# Altium PCB IO BOARD CERES V5.PcbDoc
Units mm, origin at the board's own origin, x right, y up, seen from the top; angles counter-clockwise.
Board outline 82 x 99.2 mm, 2 copper layers (Component Side, Bottom Layer), stack 1.571 mm thick; 65 components, 40 nets, 238 pads, 32 vias.
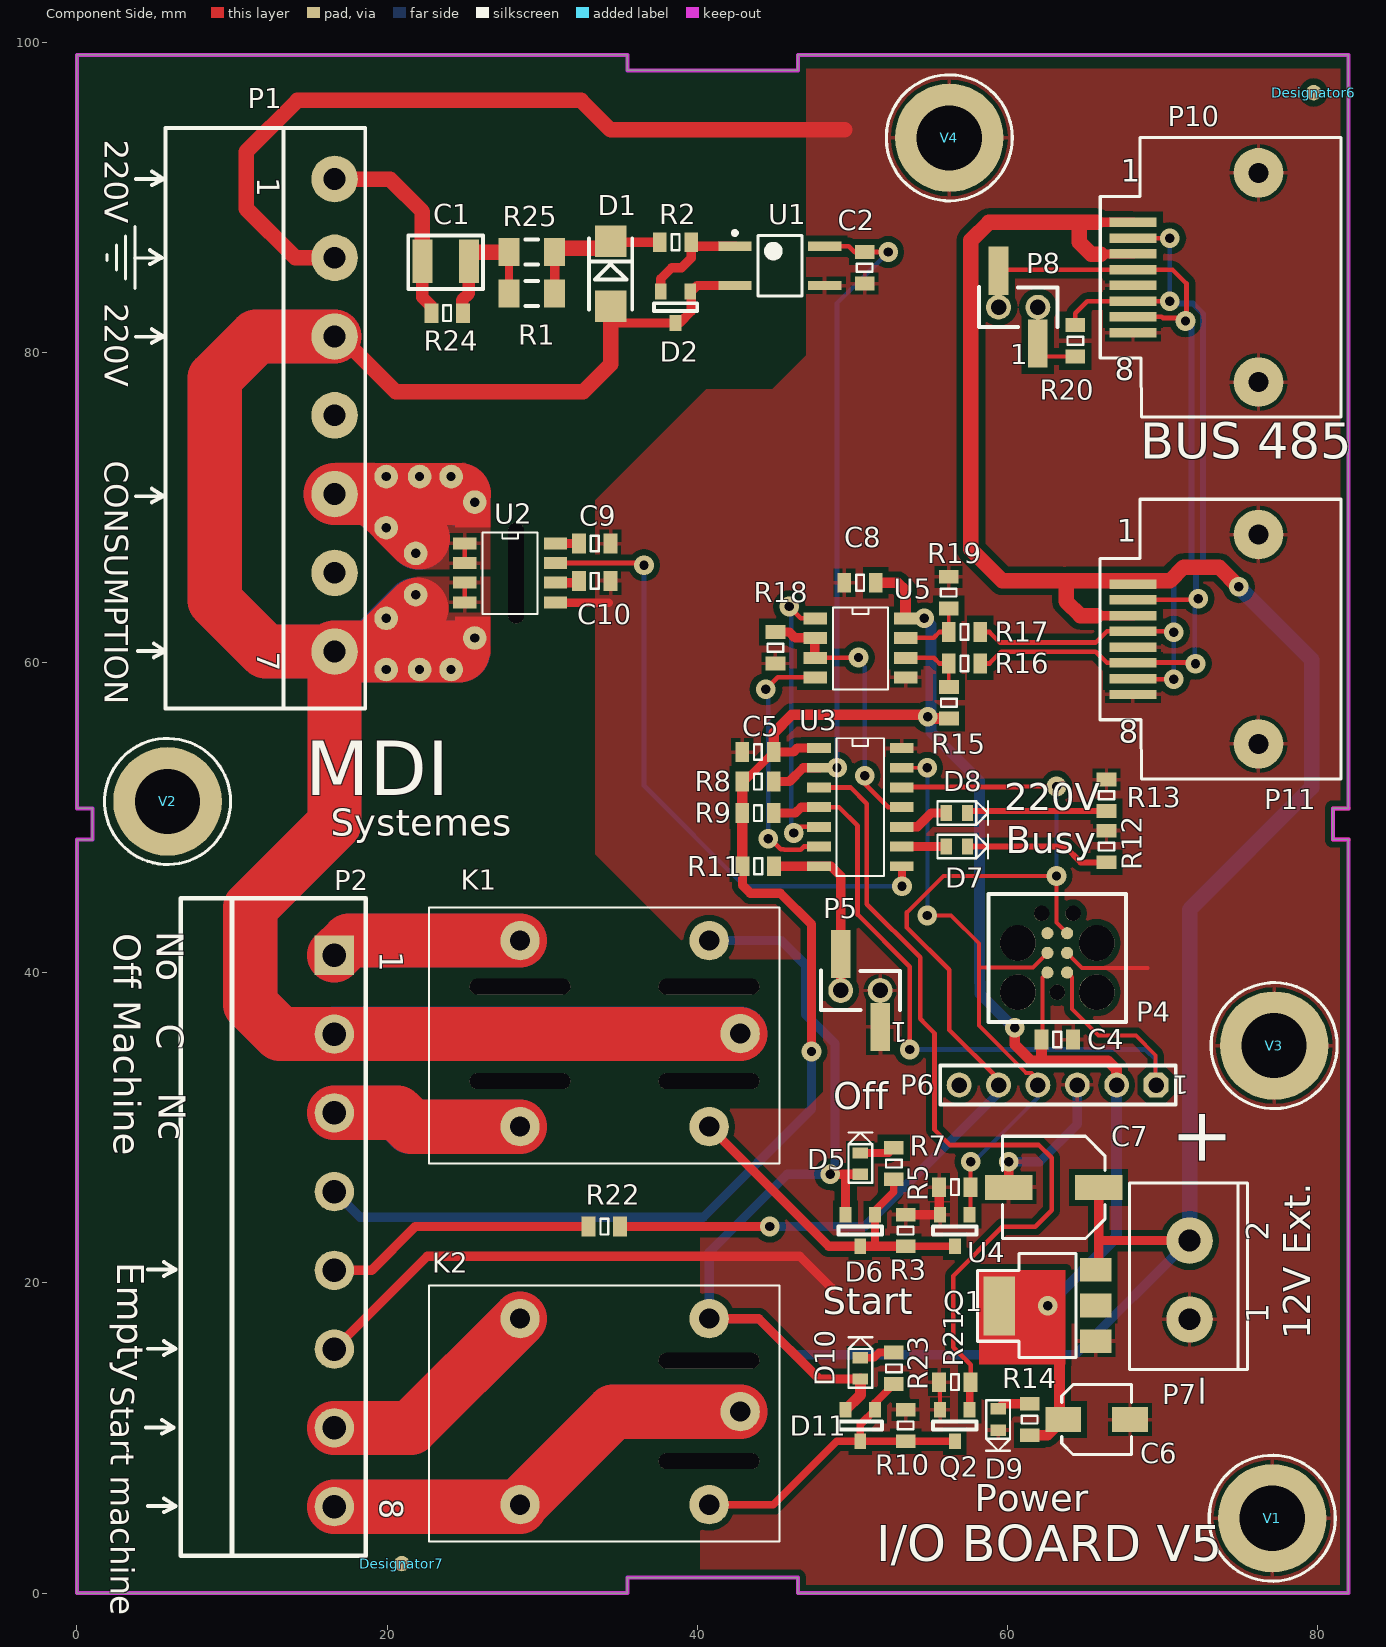
[diagram p0: Component Side view]
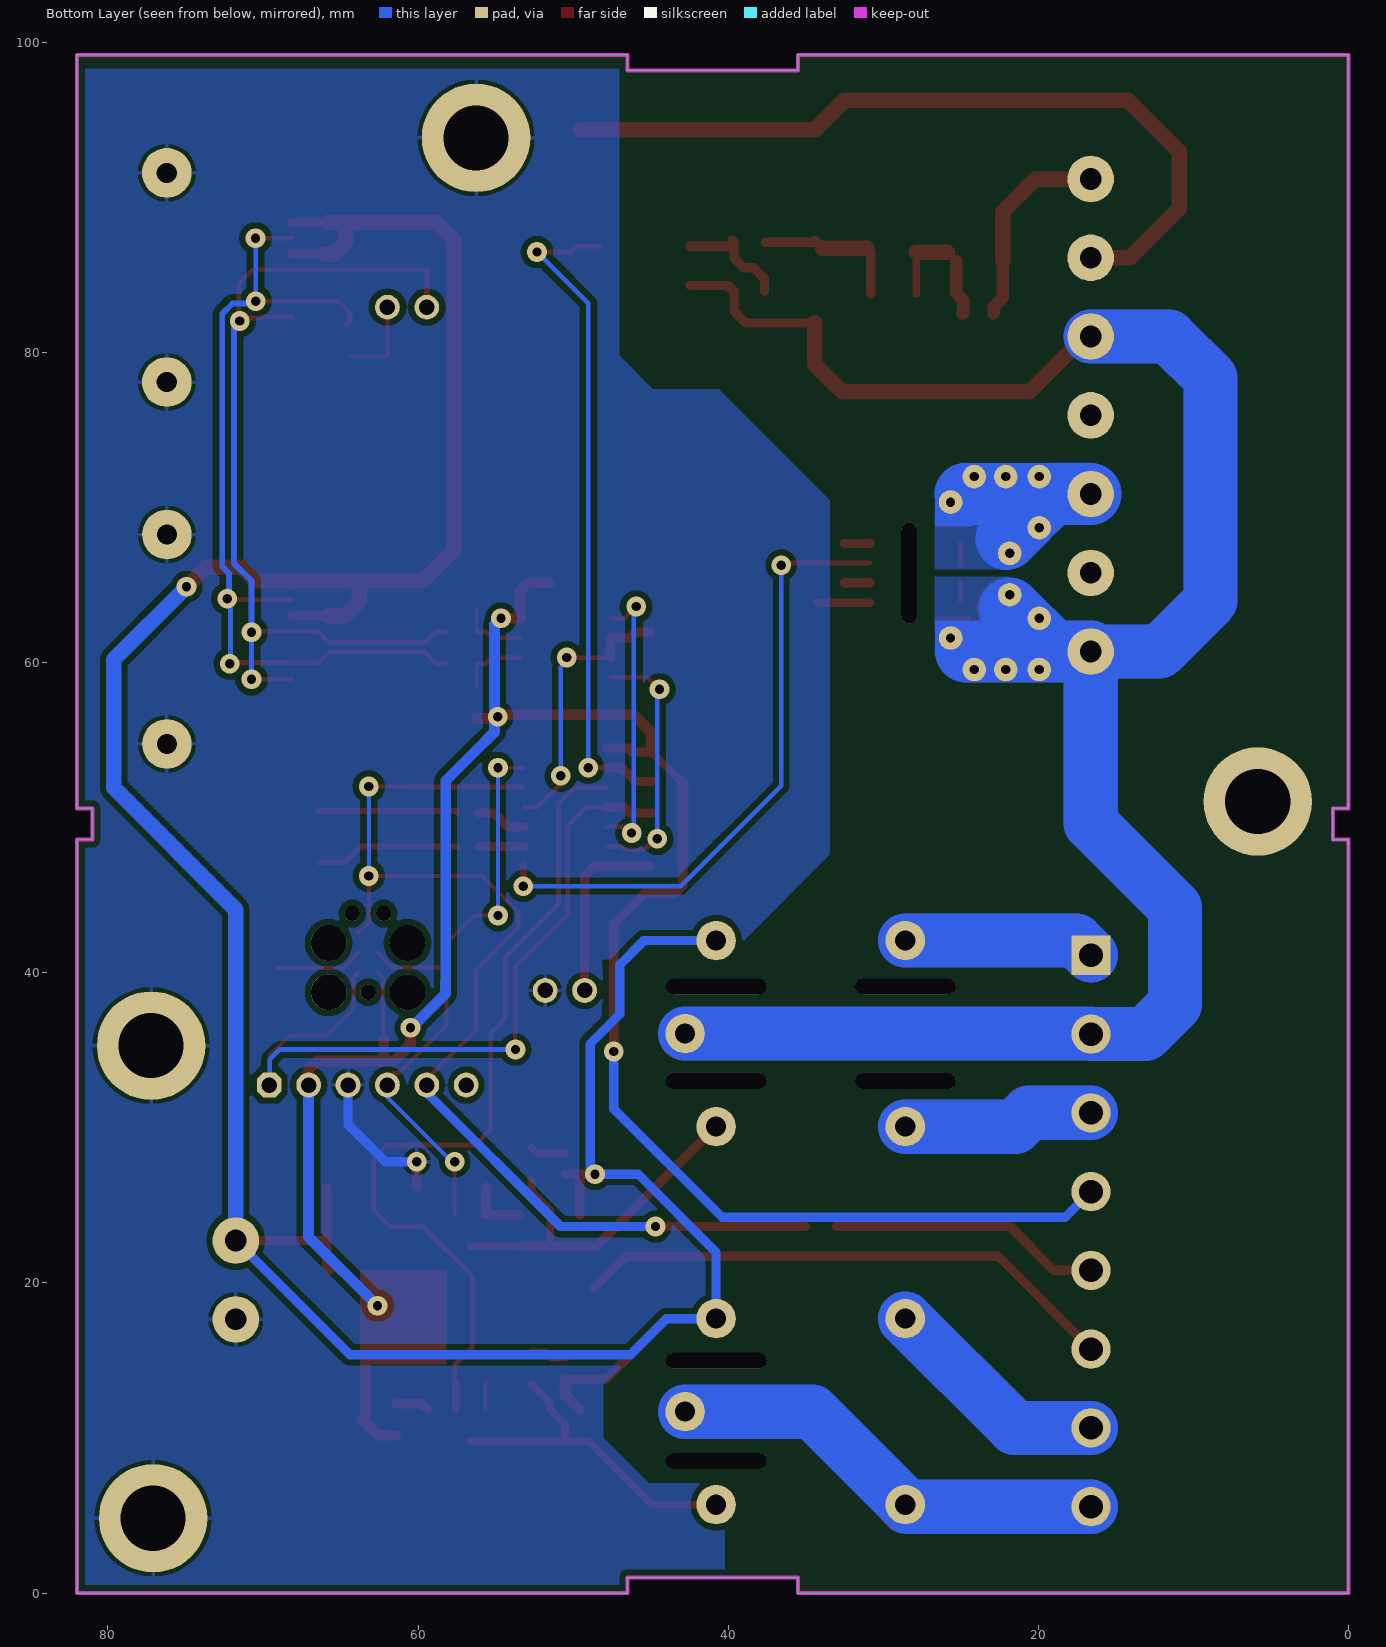
[diagram p1: Bottom Layer view, seen from below]
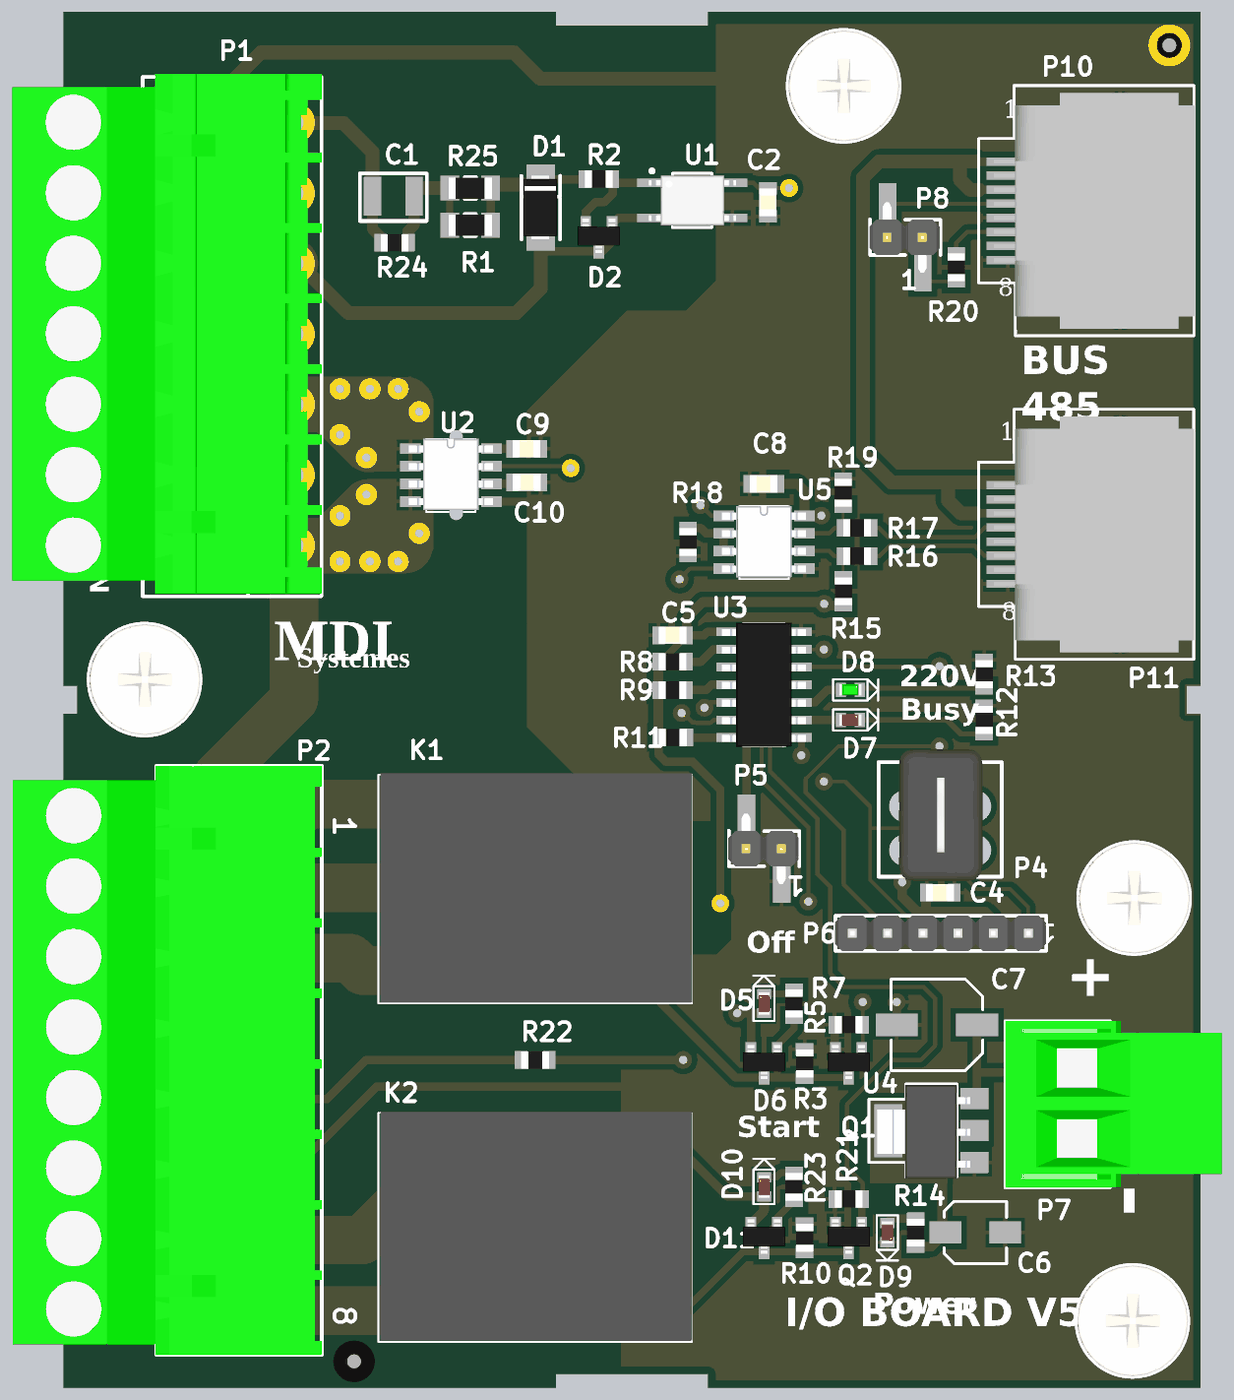
[diagram p2: 3D render of the assembled board from above, using the file's embedded part models]

## Layer stack, top to bottom
Top Solder: solder mask 0.0102, Solder Resist, Dk 3.5
Component Side: signal copper 0.0356
Dielectric 1: core 1.5, FR-4, Dk 4.2
Bottom Layer: signal copper 0.0356
Solder Side: solder mask 0.0102, Solder Resist, Dk 3.5

## Board outline
0,0 0,48.6 1,48.6 1,50.6 0,50.6 0,99.2 35.5,99.2 35.5,98.2 46.5,98.2 46.5,99.2 82,99.2 82,50.6 81,50.6 81,48.6 81.996,48.603 81.996,0 46.5,0 46.5,1 35.5,1 35.5,0

## Design rules (kind name [scope] priority, off if disabled: settings)
Clearance Clearance_2 [InPolygon vs InNet('TERRE')] p1: gap=2
Clearance Clearance_1 [InPolygon] p2: gap=0.4
Clearance [All] p3: gap=0.3
DiffPairsRouting DiffPairsRouting_1 [All] p1: maxlimit=0.4 minlimit=0.254 mostfreqgap=0.3 toplayer_minwidth=0.381 toplayer_maxwidth=0.381 toplayer_prefwidth=0.3 bottomlayer_minwidth=0.381 bottomlayer_maxwidth=0.381 bottomlayer_prefwidth=0.3 maxuncoupledlength=5
FabricationTestPointUsage TestPointUsage [All] p1: valid=0 allowmultiple=FALSE
FabricationTestpoint Testpoint [All] p1: side=3 testpointundercomponent=TRUE minsize=1.016 maxsize=2.54 preferedsize=1.524 minholesize=0 maxholesize=1.016 preferedholesize=0.813 testpointgrid=0.025 allowsidetop=TRUE allowsidebottom=TRUE usegrid=TRUE gridtolerance=0
HoleSize [All] p1: absolutevalues=TRUE maxlimit=10 minlimit=0.025 maxpercent=80.000 minpercent=20.000
MinimumSolderMaskSliver [All] p1: minsoldermaskwidth=0
PolygonConnect [All] p1: connectstyle=Relief reliefconductorwidth=0.254 reliefentries=4 polygonreliefangle="90 Angle" airgapwidth=0.254
RoutingVias [All] p1: holewidth=0.6 width=1.27 viastyle="Through Hole" minholewidth=0.5 minwidth=1.27 maxholewidth=0.9 maxwidth=1.35
SMDNeckDown [All] p1: percent=200.000
SilkToSilkClearance [All] p1: silktosilkclearance=0.1
SilkToSolderMaskClearance SilkscreenOverComponentPads [IsPad] p1: minsilkscreentomaskgap=0.1 clearancetoexposedcopper=TRUE
SolderMaskExpansion [All] p1: expansion=0
Width "Schematic Width Constraint" [InNet('GND')] p1: maxlimit=2 minlimit=0.254 preferedwidth=0.55
Width Width_3 [InNet('+5')] p2: maxlimit=2 minlimit=0.254 preferedwidth=0.7
Width Width_2 [InNet('3.3')] p3: maxlimit=2 minlimit=0.254 preferedwidth=0.7
Width Width_1 [InNet('+12')] p4: maxlimit=2 minlimit=0.254 preferedwidth=0.7
Width [All] p5: maxlimit=6 minlimit=0.254 preferedwidth=0.6
23 further rules are at their usual default settings.

## Classes and differential pairs
differential pair D: +D_P -D_N
differential pair D1: +D1_P -D1_N

## Components (designator, comment, footprint, x,y, rotation, side; value= is the part's Value field where it differs from the comment)
C1 "150nF" C1210 23.78,85.89 r0 top
C2 "10uF" C0805 50.8,85.471 r270 top
C4 "100nF" C0805 63.225,35.7 r180 top
C5 "100nF" C0805 43.921,54.242 r0 top
C6 "10uF" KEMET_4 65.765,11.189 r0 top
C7 "100uF" KEMET_63 62.992,26.162 r180 top
C8 "100nF" C0805 50.509,65.159 r180 top
C9 "100nF" C0805 33.401,67.691 r180 top
C10 "1nF" C0805 33.401,65.278 r0 top
D1 "BZG03C12" SMA 34.417,85.09 r90 top
D2 "BAT54S" SOT23 38.608,82.931 r0 top
D5 "HSMH-C190" 0603-LEDR 50.525,27.699 r90 top
D6 "BAT54S" SOT23 50.525,23.381 r0 top
D7 "HSMH-C190" 0603-LEDR 56.748,48.146 r0 top
D8 "HSMH-C190" 0603-LEDV 56.748,50.305 r0 top
D9 "HSMH-C190" 0603-LEDR 59.415,11.189 r270 top
D10 "HSMH-C190" 0603-LEDR 50.525,14.491 r90 top
D11 "BAT54S" SOT23 50.525,10.808 r0 top
Designator6 "Comment" MIRE 79.756,96.774 r90 top
Designator7 "Comment" MIRE 20.955,1.905 r90 top
K1 "RELAY NAISJS" RELAIG5L 42.778,36.081 r180 top
K2 "RELAY NAISJS" RELAIG5L 42.778,11.697 r180 top
P1 "Header 7" CO7P508-90 16.616,91.199 r270 top locked
P2 "Header 8" "CO8P508 - 90°" 16.6,41.13 r270 top locked
P4 "ICSP1" TC2030 63.225,38.748 r90 top
P5 "CLR" M20_1X2 50.53,38.862 r180 top
P6 "ICSP2" 6SIP100 69.596,32.766 r180 top
P7 "Alim 12V ext." CO2P508 71.755,17.653 r90 top
P8 "EIA-485 TERMINAISON" M20_1X2 60.706,82.931 r180 top
P10 "RJ45" RJ45_8-5406721-1 72.157,84.847 r180 top
P11 "RJ45" RJ45_8-5406721-1 72.154,61.514 r180 top
Q1 "2N7002" SOT23 56.621,23.381 r0 top
Q2 "2N7002" SOT23 56.621,10.808 r0 top
R1 "1.5K 1/2W" R1206 29.337,83.82 r180 top
R2 "1K" R0805 38.608,87.122 r0 top
R3 "56K" R0805 53.446,23.381 r270 top
R5 "56K" R0805 56.621,26.175 r0 top
R7 "1K" R0805 52.684,27.699 r90 top
R8 "56K" R0805 43.921,52.337 r180 top
R9 "56K" R0805 43.921,50.305 r180 top
R10 "56K" R0805 53.446,10.808 r270 top
R11 "56K" R0805 43.942,46.876 r180 top
R12 "220" R0805 66.4,48.146 r270 top
R13 "220" R0805 66.4,51.448 r270 top
R14 "270" R0805 61.447,11.189 r270 top
R15 "1M" R0805 56.24,57.417 r270 top
R16 "56" R0805 57.24,59.952 r0 top
R17 "56" R0805 57.24,61.984 r0 top
R18 "1K" R0805 45.048,60.968 r90 top
R19 "1M" R0805 56.224,64.524 r270 top
R20 "120" R0805 64.389,80.772 r90 top
R21 "56K" R0805 56.621,13.602 r0 top
R22 "1K" R0805 34.015,23.635 r180 top
R23 "1K" R0805 52.684,14.491 r90 top
R24 "1M" R0805 23.876,82.55 r180 top
R25 "3.3K 1/2W" R1206 29.337,86.487 r180 top
U1 "HCPL-181" OPTO-4PIN 45.339,85.598 r0 top
U2 "ACS712" SOIC8 27.94,65.799 r0 top
U3 "PIC16F1824" SO-14 50.525,50.686 r0 top
U4 "LM1117DT-5.0" SOT223 62.59,18.542 r90 top
U5 "ADM4851ARZ" SOIC8 50.53,60.955 r0 top
V1 "VIS" VIS42 77.089,4.826 r0 top
V2 "VIS" VIS42 5.842,51.054 r0 top
V3 "VIS" VIS42 77.216,35.306 r0 top
V4 "VIS" VIS42 56.261,93.853 r0 top

## Footprints (in the part's own frame and the unit in brackets; to place one, negate y for a bottom-side part, rotate by r counter-clockwise, add the part's x,y. Pads: shape width x height; smd on the part's side, far side on the other; paste and mask are expansions set on the pad)
6SIP100 [mm]
  oct 1.6x1.6 hole 1: 1(0,0)
  round 1.6 hole 1: 2(2.54,0) 3(5.08,0) 4(7.62,0) 5(10.16,0) 6(12.7,0)
  silkscreen extent -1.27,-1.27 13.92,1.27, body extent -1.27,-1.27 13.96,1.27, height 8.4
0603-LEDR [mm]
  rect 0.725x1.016 smd paste+0 mask+0: 1(-0.69,0) 2(0.69,0)
  silkscreen extent -1.24,-0.76 2.01,0.76, body extent -0.8,-0.4 0.8,0.4, height 0.69
0603-LEDV [mm]
  rect 0.725x1.016 smd: 1(-0.69,0) 2(0.69,0)
  silkscreen extent -1.24,-0.76 2.01,0.76, body extent -0.8,-0.4 0.8,0.4, height 0.69
C0805 [mil]
  rect 35x50 smd: 1(-40,0) 2(40,0)
  silkscreen extent -10,-20 10,20, body extent -39,-25 40,25, height 56
C1210 [mm]
  rect 1.27x2.8 smd paste+0 mask+0: 1(-1.5,0)
  rect 1.27x2.8 smd mask+0: 2(1.5,0)
  silkscreen extent -2.41,-1.78 2.41,1.65, body extent -1.52,-1.27 1.52,1.27, height 1
CO2P508 [mm]
  round 3 hole 1.4: 1(0,0) 2(5.08,0)
  silkscreen extent -3.23,-3.75 8.79,3.86, body extent -3.2,-11.79 8.78,3.86, height 22.32
CO7P508-90 [mm]
  round 3 hole 1.4: 1(0,0) 2(5.08,0) 3(10.16,0) 4(15.24,0) 5(20.32,0) 6(25.4,0) 7(30.48,0)
  silkscreen extent -3.3,-10.91 34.14,1.98, body extent -3.51,-20.3 33.93,2, height 15.56
"CO8P508 - 90°" [mil]
  rect 100x100 hole 60: 1(0,0)
  round 100 hole 60: 2(200,0) 3(400,0) 4(600,0) 5(800,0) 6(1000,0) 7(1200,0) 8(1400,0)
  silkscreen extent -145,-390 1525,80, body extent -146,-798 1526,80, height 606
KEMET_4 [mm] "Aluminum Electrolytic Capacitor, Body 4,30x4,30x6,10mm, IPC Medium Density"
  rect 2.3x1.6 smd: 1(-2.15,0) 2(2.15,0)
  silkscreen extent -2.25,-2.25 2.25,2.25, body extent -2.6,-2.25 2.6,2.25, height 4.7
KEMET_63 [mm] "Aluminum Electrolytic Capacitor, Body 6,50x6,50x6,10mm, IPC Medium Density"
  rect 3.05x1.6 smd: 1(-2.9,0) 2(2.9,0)
  silkscreen extent -3.3,-3.3 3.3,3.3, body extent -3.49,-3.39 3.51,3.41, height 8.8
M20_1X2 [mm] "Connecteur Harwin_M20-8770242"
  rect 1.27x3.1 smd: 1(-1.27,2.35) 2(1.27,-2.35)
  round 1.6 hole 1: 1(-1.27,0) 2(1.27,0)
  silkscreen extent -2.54,-1.3 2.54,1.27, body extent -2.5,-2.54 2.58,2.54, height 9.95
MIRE [mm]
  round 1 smd mask+1: Mire(0,0)
OPTO-4PIN [mm] "SOP, 4-Leads, Body 3,60x4,40mm, Pitch 2,54mm, IPC Medium Density"
  rect 2.15x0.6 smd: 1(-2.9,1.27) 2(-2.9,-1.27) 3(2.9,-1.27) 4(2.9,1.27)
  silkscreen extent -3.02,-1.95 1.43,2.24, body extent -3.13,-1.8 3.17,1.8, height 2.2
R0805 [mil]
  rect 35x50 smd: 1(-40,0) 2(40,0)
  silkscreen extent -10,-20 10,20, body extent -39,-24 39,25, height 20
R1206 [mm]
  rect 1.35x1.8 smd: 1(-1.475,0) 2(1.475,0)
  silkscreen extent -0.4,-0.8 0.4,0.8, body extent -1.55,-0.76 1.55,0.79, height 0.57
RELAIG5L [mm]
  round 2.54 hole 1.295: 1(0,0) 2(2,-6) 3(14.2,-6) 4(14.2,6) 5(2,6)
  silkscreen extent -2.54,-8.13 20.07,8.38, body extent -2.57,-8.2 19.93,8.3, height 19
RJ45_8-5406721-1 [mm] "TE Connectivity"
  rect 3.05x0.6 smd: 1(4.047,-3.556) 2(4.047,-2.54) 3(4.047,-1.524) 4(4.047,-0.508) 5(4.047,0.508) 6(4.047,1.524) 7(4.047,2.54) 8(4.047,3.556)
  round 3.2 hole 1.3: 9(-4.047,6.75) 9(-4.047,-6.75)
  silkscreen extent -9.36,-9.03 6.16,9, body extent -9.41,-8.5 5.06,8.5, height 12.5
SMA [mil]
  rect 80x80 smd: 1(-82.7,0) 2(82.7,0)
  silkscreen extent -91,-55 90,55, body extent -91,-47 91,49, height 86
SO-14 [mil]
  rect 60x25 smd: 1(-105,150) 2(-105,100) 3(-105,50) 4(-105,0) 5(-105,-50) 6(-105,-100) 7(-105,-150) 8(105,-150) 9(105,-100) 10(105,-50) 11(105,0) 12(105,50) 13(105,100) 14(105,150)
  silkscreen extent -60,-175 60,175, body extent -120,-176 119,176, height 69
SOIC8 [mil]
  rect 59.1x30.3 smd: 1(-115,75) 2(-115,25) 3(-115,-25) 4(-115,-75) 5(115,-75) 6(115,-25) 7(115,25) 8(115,75)
  silkscreen extent -70,-105 70,102, body extent -120,-100 119,103, height 69
SOT23 [mil]
  rect 30x40 smd: 1(37.5,40) 2(-37.5,40) 3(0,-40)
  silkscreen extent -55,-10 55,10, body extent -60,-45 60,53, height 47
SOT223 [mil]
  rect 60x80 smd: 1(-90.6,-122.5) 2(0,-122.5) 3(90.6,-122.5)
  rect 150x80 smd: 4(-0.6,122.5)
  silkscreen extent -132,-73 132,178, body extent -137,-111 129,154, height 73
TC2030 [mil]
  round 31 smd: 1(50,-25) 2(50,25) 3(100,-25) 4(100,25) 5(150,-25) 6(150,25)
  round 90.55 hole 90.55 unplated: A1(0,-100) A2(125,-100) A3(0,100) A4(125,100)
  round 39 hole 39.37 unplated: A5(0,0) A6(200,40) A7(200,-40)
  silkscreen extent -75,-175 250,175, body extent -87,-120 287,116, height 626
VIS42 [mm]
  round 7 hole 4.199: 1(0,0)
  silkscreen extent -4.06,-4.06 4.06,4.06, body extent -3.97,-4 4.03,4, height 3.09

## Part data
C1: library part Cap, "Capacitor"
C2 C7: library part "Cap Pol 100uF", "Polarized Capacitor"
C4 C5 C8 C9: library part "Cap 0805 100nF", "Capacitor"
C6: library part "Cap Pol1", "Polarized Capacitor"
C10: library part "Cap 0805 1nF", "Capacitor"
D1: library part DZ
D2 D6 D11: "Schottky Barrier Double Diode"
D5 D7 D8 D9 D10: "Surface Mount Chip LED, Red"
P1: "Header, 7-Pin"
P2: "Header, 8-Pin"
P4 P6: library part "Header 6", "Header, 6-Pin"
P5 P7 P8: library part "Header 2", "Header, 2-Pin"
P10 P11: library part "Header 8", "Header, 8-Pin"
Q1 Q2: "N-channel Enhancement Mode Field-effect Transistor"
R1 R24 R25: library part "Resistor 0805 470", "Resistor"
R2: library part Res2, "Resistor"
R3 R5 R8 R9 R10 R11 R21: library part "Resistor 0805 56K", "Resistor"
R7 R14 R18 R22 R23: library part "Resistor 0805 1K", "Resistor"
R12 R13: library part "Resistor 0805 220", "Resistor"
R15 R19: library part "Resistor 0805 1M", "Resistor"
R16 R17: library part "Resistor 0805 56", "Resistor"
R20: library part "Resistor 0805 120", "Resistor"
U1: library part Optoisolator1, "4-Pin Phototransistor Optocoupler"
U2: "HALL EFFECT CURRENT SENSOR"
U3: library part PIC16(L)F1824, "14 Pin Flash Microcontrollers with XLP Technology"
U4: "800mA Low-Dropout Linear Regulator, 3-pin TO-252"
U5: library part MAX485ESA, "Low-Power, Slew-Rate-Limited RS-485/RS-422 Transceiver"

## Free pads (board coordinates)
  round 6 on Top Paste: 1(-53.976,-74.879) 1(-53.976,45.121) 1(-53.976,165.121) 1(-18.941,-99.379) 1(-18.941,189.621) 1(101.059,-99.379) 1(101.059,189.621) 1(136.024,-74.879) 1(136.024,165.121) 1(136.095,45.121)
  round 1.524 hole 0.6: 1(25.654,61.595) 2(19.939,72.009) 3(22.098,72.009) 4(24.13,72.009) 5(25.654,70.358) 8(21.844,67.056) 9(19.939,68.707) 10(24.13,59.563) 11(22.098,59.563) 12(19.939,59.563) 13(19.939,62.865) 14(21.844,64.389)
  oval 1x6.5 hole 1 slot 6.5 at 90 deg unplated: 2(28.321,65.786)
  oval 6.5x1 hole 1 slot 6.5 at 0 deg unplated: 2(28.575,33.02) 2(28.575,39.116) 2(40.767,8.509) 2(40.767,14.986) 2(40.767,33.02) 2(40.767,39.116)

## Via types
v1: diameter 1.27, hole 0.6, Component Side to Bottom Layer, 32 vias

## Nets (pads, with @x,y where several pads share a name; then routed paths per layer and width w, separated by ;. In a path a pad name is that pad's centre, name@x,y a point inside that pad or via, vN(x,y) a via of type N, cw(c..) or ccw(c..) an arc to the next point about the centre after c; other vN are vias at no path point)
+5: C4.2 C5.2 C6.1 C8.1 P2.4 P4.2 P6.2 R8.2 R9.2 R11.2 R14.2 R15.2 U3.1 U4.4 U5.8 | length 157.2
  Component Side w0.254: C4.2 62.262,35.753 62.262,39.69 P4.2
  Component Side w0.5: R8.2 43.032,52.337 C5.2
  Component Side w0.6: R11.2@42.926,46.914 R11.2 42.926,45.644 43.434,45.136 45.364,45.136 47.371,43.129 v1(47.371,34.925) ; C5.2 46.207,54.242 46.461,54.496 U3.1
  Component Side w0.7: R8.2 R9.2 42.905,46.897 R11.2 ; C5.2 44.937,55.476 46.103,56.642 v1@54.864,56.642 ; C8.1 52.922,65.159 53.43,64.651 53.43,62.873 v1(54.654,62.873) ; v1@55.105,56.401 R15.2 ; U4.4 U4.4@60.144,18.527 ; v1(60.484,36.45) 60.484,35.375 61.545,34.314 62.209,34.314 ; R14.2 62.599,10.173 C6.1 63.373,11.431 63.373,15.298 U4.4@60.144,18.527 ; C4.2 62.209,34.314 ; v1(62.611,18.527) U4.4@60.144,18.527 ; P6.2 67.056,33.761 66.503,34.314 62.209,34.314
  Bottom Layer w0.6: P2.4 18.258,24.232 40.386,24.232 47.371,31.217 v1(47.371,34.925)
  Bottom Layer w0.7: v1(54.654,62.873) 55.078,62.449 v1@55.078,56.301 ; v1(54.864,56.515) v1@55.078,56.301 ; v1(60.484,36.45) 60.437,36.45 58.238,38.65 58.238,39.37 58.218,39.39 58.218,52.389 56.251,54.356 55.078,55.529 v1@55.078,56.301 ; v1(62.611,18.527) 67.056,22.972 P6.2
+5V: C9.2 U2.8 | length 1.7
  Component Side w0.6: U2.8 30.874,67.691 C9.2@32.512,67.691
+12/485: C7.1 D5.1 D6.2 D10.1 D11.2 K1.2 K2.2 P7.2 P10.1 P10.3 P11.1 P11.3 U4.3 | length 208.7
  Component Side w0.6: K2.2 43.973,17.697 47.869,13.801 D10.1 ; v1(48.585,27.009) D5.1 ; D6.2 49.573,26.925 49.657,27.009 ; U4.3 65.892,21.034 65.892,22.86 ; 65.786,63.038 P11.3 ; 65.786,88.403 P10.1 ; C7.1 65.892,22.86 ; 66.04,86.36 68.099,86.36 P10.3 ; P11.1 P11.1@68.107,65.278 ; P7.2 66.019,22.733 65.892,22.86
  Component Side w0.7: D11.2 50.525,12.777 D10.1
  Component Side w1: 63.8,65.07 63.592,65.278 59.69,65.278 57.658,67.31 57.658,87.249 58.812,88.403 64.654,88.403 ; 65.786,63.038 64.724,63.038 63.8,63.962 63.8,65.278 68.107,65.278 70.485,65.278 71.374,66.167 73.66,66.167 v1(74.93,64.897) ; 65.786,88.403 64.654,88.403 ; 66.04,86.36 65.405,86.36 64.654,87.111 64.654,88.403
  Bottom Layer w0.6: K1.2 45.422,42.081 46.99,40.513 46.99,37.338 48.895,35.433 48.895,27.32 v1(48.585,27.009) 45.805,27.009 40.778,21.982 K2.2 43.973,17.697 46.303,15.367 64.389,15.367 P7.2
  Bottom Layer w1: P7.2 71.755,44.069 79.629,51.943 79.629,60.198 v1(74.93,64.897)
\M\C\L\R\: P4.1 P6.1 R9.1 U3.4 | length 50.3
  Component Side w0.254: 64.165,39.713 64.165,37.681 65.892,35.954 68.305,35.954 69.575,34.684 69.575,32.787 P6.1
  Component Side w0.3: U3.4 49.15,50.686 50.345,49.491 50.345,43.762 53.721,40.386 v1(53.721,35.052) ; P4.1 64.165,39.713
  Component Side w0.6: R9.1 46.334,50.305 46.715,50.686 U3.4
  Bottom Layer w0.3: v1(53.721,35.052) 68.94,35.052 69.575,34.417 P6.1@69.575,33.16
D1_N: R15.1 R16.1 U5.6 | length 4.5
  Component Side w0.2: R15.1@56.224,58.428 R16.1
  Component Side w0.3: U5.6@53.43,60.333 55.248,60.333 55.629,59.952 R16.1
D1_P: R17.1 R19.2 U5.7 | length 4.5
  Component Side w0.2: R17.1 R19.2
  Component Side w0.3: U5.7@53.43,61.603 55.248,61.603 55.629,61.984 R17.1
D_N: P10.2 P10.6 P11.2 P11.6 R16.2 R20.2 | length 58.4
  Component Side w0.3: R16.2 58.85,59.952 59.605,60.706 65.716,60.706 66.432,59.99 P11.6 68.13,60.013 72.067,60.013 v1@71.824,59.77 ; R20.2@64.662,81.753 64.389,82.026 64.389,82.55 65.162,83.323 P10.6 v1(70.474,83.323) ; P11.2 72.228,64.054 v1(72.309,64.135) ; P10.2 68.121,87.376 v1(70.485,87.376)
  Bottom Layer w0.3: v1(70.474,83.323) 70.474,87.365 v1(70.485,87.376) ; v1@72.101,64.343 72.101,59.979 v1(72.136,59.944)
  Bottom Layer w0.381: v1(70.474,83.323) 70.63,83.167 71.967,83.167 72.626,82.508 72.626,66.202 72.182,65.758 v1@72.182,64.262 ; v1@72.101,64.343 v1@72.182,64.262 ; v1(72.309,64.135) v1@72.182,64.262
D_P: P8.2 P10.4 P10.7 P11.4 P11.7 R17.2 | length 60
  Component Side w0.3: R17.2 58.85,61.984 59.528,61.306 65.716,61.306 66.432,62.022 P11.4 70.693,62.022 v1(70.739,61.976) ; P8.2@59.436,85.355 P10.4 70.659,85.355 71.559,84.455 71.559,82.1 v1(71.501,82.042) 71.305,82.238 70.024,82.238 69.955,82.307 P10.7 ; P11.7 68.153,58.928 v1@70.49,58.928
  Component Side w0.381: P8.2@59.436,82.931 P8.2@59.436,85.281
  Bottom Layer w0.3: v1(70.739,58.928) v1(70.739,61.976)
  Bottom Layer w0.381: v1(70.739,61.976) 70.739,65.278 71.882,66.421 71.882,81.661 v1(71.501,82.042)
GND: C2.2 C4.1 C5.1 C6.2 C7.2 C8.2 C9.1 C10.2 D9.2 P1.2 P2.6 P4.3 P5.1 P6.3 P7.1 P10.5 P10.8 P10.9 P11.5 P11.8 P11.9 Q1.2 Q2.2 R3.1 R5.1 R10.1 R12.1 R13.1 R18.1 R19.1 R21.1 U1.3 U2.5 U3.14 U4.1 U5.5 V1.1 V3.1 V4.1 | length 111.3
  Component Side w0.254: R21.1 55.669,13.539 Q2.2 ; P4.3 64.823,40.325 69.056,40.325
  Component Side w0.55: U2.5 30.861,63.876 33.566,63.876 33.571,63.881 34.29,63.881
  Component Side w0.6: P2.6 22.587,21.717 46.609,21.717 48.641,19.685 ; R3.1 Q1.2 55.605,24.461 R5.1 ; C7.2 v1(60.092,27.81)
  Component Side w1: P1.2 14.084,86.119 10.922,89.281 10.922,92.964 14.224,96.266 32.512,96.266 34.417,94.361 49.53,94.361
  Bottom Layer w0.6: v1(60.092,27.81) 62.1,27.81 64.516,30.226 P6.3
NetC1_1: C1.1 P1.1 R24.2 | length 13.3
  Component Side w0.8: C1.1 22.28,83.566 22.86,82.986 R24.2
  Component Side w1: P1.1@16.637,91.186 20.193,91.186 22.28,89.099 C1.1
NetC1_2: C1.2 R1.2 R24.1 R25.2 | length 9.1
  Component Side w0.5: C1.2 C1.2@25.877,86.487 ; R1.2 R25.2
  Component Side w0.8: R24.1 24.867,82.55 24.841,82.575 24.841,83.388 25.28,83.827 C1.2
  Component Side w1: C1.2@25.877,86.487 R25.2
NetC2_1: C2.1 R8.1 U1.4 U3.2 | length 43.3
  Component Side w0.3: U3.2 v1(49.02,53.226) ; U1.4 49.784,86.868 50.165,86.487 C2.1 v1(52.324,86.487)
  Component Side w0.6: R8.1 45.953,52.337 46.842,53.226 U3.2
  Bottom Layer w0.3: v1(49.02,53.226) 49.02,83.183 51.422,85.585 v1(52.324,86.487)
NetC10_1: C10.1 U2.6 | length 1.7
  Component Side w0.6: U2.6 C10.1@32.512,65.164
NetD1_1: D1.1 D2.1 D2.3 K1.1 P1.3 P1.7 P2.2 pad.1@25.654,61.595 pad.10 pad.11 pad.12 pad.13 pad.14 U1.2 U2.3 U2.4 | length 236.9
  Component Side w0.3: U2.4@25.019,64.008 U2.3
  Component Side w0.6: 34.417,81.915 38.862,81.915 39.624,82.677 39.624,83.947 40.005,84.328 U1.2
  Component Side w1: P1.3 17.005,81.039 20.574,77.47 32.639,77.47 34.417,79.248 34.417,81.915
  Component Side w3.5: P1.3 11.57,81.039 8.89,78.359 8.89,64.008 12.179,60.719 P1.7 16.616,49.636 11.176,44.196 11.176,37.973 13.099,36.05 K1.1@42.778,36.05
  Component Side w4: P1.7 19.19,60.719 ; 21.971,63.5 19.19,60.719 ; 24.638,60.719 19.19,60.719
  Bottom Layer w3.5: P1.3 11.57,81.039 8.89,78.359 8.89,64.008 12.179,60.719 P1.7 16.616,49.636 11.176,44.196 11.176,37.973 13.099,36.05 P2.2 16.631,36.081 K1.1
  Bottom Layer w4: P1.7 19.063,60.719 ; 21.844,63.5 19.063,60.719 ; 24.663,60.719 19.063,60.719
NetD1_2: D1.2 R1.1 R2.1 R25.1 | length 9.9
  Component Side w0.6: R1.1 R25.1 R25.1@31.066,86.741 ; D1.2@33.909,86.741 D1.2@34.417,87.249 ; D1.2 D1.2@34.417,87.249 ; R2.1 34.544,87.122 D1.2@34.417,87.249
  Component Side w1: R25.1@31.066,86.741 D1.2@33.909,86.741
NetD2_2: D2.2 R2.2 U1.1 | length 7.4
  Component Side w0.6: D2.2 37.656,84.773 38.354,85.471 38.989,85.471 39.624,86.106 R2.2 ; R2.2@39.751,87.249 39.751,86.868 U1.1
NetD5_2: D5.2 R7.2 | length 2.3
  Component Side w0.5: D5.2 52.358,28.389 R7.2
NetD6_1: D6.1 D6.3 K1.5 Q1.3 R3.2 R7.1 | length 25.2
  Component Side w0.5: D6.3 50.589,22.429 51.478,22.429 D6.1 51.478,24.684 52.684,25.89 R7.1 ; R3.2 Q1.3
  Component Side w0.6: K1.5@41.179,30.081 K1.5 48.494,22.365 D6.3 R3.2
NetD7_1: D7.1 U3.9 | length 2.9
  Component Side w0.6: U3.9 D7.1
NetD7_2: D7.2 R12.2 | length 9.4
  Component Side w0.381: D7.2 63.72,48.146 64.736,47.13 R12.2
NetD8_1: D8.1 U3.10 | length 3.2
  Component Side w0.6: U3.10 54.208,49.416 55.097,50.305 D8.1
NetD8_2: D8.2 R13.2 | length 9
  Component Side w0.381: D8.2 57.565,50.432 R13.2
NetD9_1: D9.1 R14.1 | length 2.2
  Component Side w0.6: D9.1 59.741,12.205 R14.1
NetD10_2: D10.2 R23.2 | length 2.3
  Component Side w0.5: D10.2 51.406,15.181 51.732,15.507 R23.2
NetD11_1: D11.1 D11.3 K2.5 Q2.3 R10.2 R23.1 | length 22.1
  Component Side w0.5: K2.5 44.906,5.697 49.001,9.792 D11.3 ; R23.1 51.478,12.269 D11.1 50.525,10.872 D11.3 ; Q2.3 R10.2 D11.3
NetK1_3: K1.3 P2.1 | length 24.7
  Component Side w3.5: P2.1 17.551,42.081 K1.3
  Bottom Layer w3.5: P2.1 17.551,42.081 K1.3
NetK1_4: K1.4 P2.3 | length 24.7
  Component Side w3.5: P2.3 20.68,30.97 21.569,30.081 K1.4
  Bottom Layer w3.5: P2.3 20.592,30.97 21.481,30.081 K1.4
NetK2_1: K2.1 K2.4 P2.8 | length 57.4
  Component Side w3.5: P2.8 K2.4@28.578,5.57 ; K2.4 34.578,11.697 K2.1
  Bottom Layer w3.5: P2.8 28.451,5.57 K2.4 34.578,11.697 K2.1
NetK2_3: K2.3 P2.7 | length 29.8
  Component Side w3.5: P2.7 21.531,10.65 K2.3
  Bottom Layer w3.5: P2.7 21.531,10.65 K2.3
NetP1_5: P1.5 pad.2@19.939,72.009 pad.3 pad.4 pad.5 pad.8 pad.9 U2.1 U2.2 | length 22.4
  Component Side w0.3: U2.2@25.019,66.294 U2.2 U2.1
  Component Side w4: P1.5 18.529,70.879 18.542,70.866 ; 19.177,70.879 21.971,68.085 ; 21.844,70.879 24.689,70.879 ; 21.971,68.072 21.971,68.085 ; 22.054,68.002 21.971,68.085
  Bottom Layer w4: P1.5 19.164,70.879 ; 22.047,67.996 19.164,70.879 ; 24.689,70.879 19.164,70.879
NetP2_5: P2.5 R22.2 | length 17.6
  Component Side w0.6: P2.5 18.998,20.81 21.823,23.635 R22.2
NetP5_2: P5.2 R11.1 U3.7 | length 11.8
  Component Side w0.6: R11.1@45.064,46.876 U3.7 48.628,46.876 49.255,46.249 49.255,41.217 49.26,41.212 P5.2@49.26,38.862
NetP8_1: P8.1 R20.1 | length 5.6
  Component Side w0.254: P8.1@61.976,82.931 61.976,80.581 61.976,79.756 R20.1
NetQ2_1: Q2.1 R21.2 U3.3 | length 55.3
  Component Side w0.3: U3.3 49.898,51.956 50.945,50.909 50.945,44.432 54.383,40.994 54.383,37.036 54.716,36.703 55.307,36.112 55.307,29.885 56.294,28.898 62.034,28.898 62.865,28.067 62.865,24.684 61.803,23.622 59.69,23.622 56.515,20.447 56.515,15.854 57.637,14.732 R21.2
  Component Side w0.5: Q2.1 57.574,13.539 R21.2
NetR18_2: R18.2 U3.11 U5.2 U5.3 | length 17.7
  Component Side w0.3: U5.3@47.588,60.333 v1(50.403,60.333) ; v1(50.8,52.705) 50.8,52.197 52.311,50.686 U3.11
  Component Side w0.6: R18.2 45.937,61.984 46.318,61.603 47.588,61.603 U5.3@47.588,60.333
  Bottom Layer w0.3: v1(50.403,60.333) v1@50.657,60.079 ; v1(50.8,52.705) 50.8,59.703
NetU2_7: U2.7 U3.8 | length 40.3
  Component Side w0.3: U2.7 v1@36.309,66.434
  Component Side w0.5: U3.8 53.213,46.855 v1(53.213,45.593)
  Bottom Layer w0.3: v1(36.576,66.294) 36.576,52.07 43.053,45.593 v1(53.213,45.593)
NetU3_5: U3.5 U5.1 | length 18.5
  Component Side w0.3: v1(45.937,63.622) 46.686,62.873 U5.1@47.588,62.873 ; v1(46.228,49.022) 46.622,49.416 U3.5
  Bottom Layer w0.3: v1(45.937,63.622) 46.08,63.478 46.08,49.17 v1(46.228,49.022)
NetU3_6: U3.6 U5.4 | length 16.4
  Component Side w0.3: v1(44.434,58.288) 45.203,59.057 47.582,59.057 U5.4@47.588,59.063 ; v1(44.577,48.641) 44.704,48.641 45.384,47.961 45.589,47.961 45.613,47.937 46.677,47.937 46.886,48.146 U3.6
  Bottom Layer w0.3: v1(44.577,48.641) v1@44.577,57.912
PGEC1: P4.5 P6.5 R22.1 U3.12 | length 80
  Component Side w0.254: 53.528,43.9 55.877,46.249 v1(63.175,46.249) ; 60.783,51.956 U3.12 53.256,52.02 v1(63.175,52.02) ; v1@63.185,46.259 v1(63.175,46.249) ; P4.5 63.175,43.243 v1(63.175,46.249)
  Component Side w0.3: 53.528,43.9 53.528,42.926 56.261,40.193 56.261,36.314 P6.5@59.415,33.16
  Component Side w0.6: R22.1 v1(44.691,23.635)
  Bottom Layer w0.254: v1(63.175,46.249) v1(63.175,52.02)
  Bottom Layer w0.6: v1(44.691,23.635) 50.813,23.635 59.415,32.237 P6.5@59.415,33.16
PGED1: P4.4 P6.4 Q1.1 R5.2 U3.13 | length 41.3
  Component Side w0.254: U3.13 v1(54.843,53.226) ; v1(54.843,43.701) 56.375,43.701 58.166,41.91 58.166,40.346 ; Q1.1 57.637,24.461 R5.2 v1(57.637,27.813) ; P6.4@61.955,32.766 61.955,33.16 61.578,33.537 61.223,33.537 58.166,36.594 58.166,40.346 ; P4.4 61.648,40.346 58.166,40.346
  Bottom Layer w0.254: v1(54.843,43.701) v1(54.843,53.226) ; v1(57.637,27.813) 57.817,27.813 61.976,31.972 P6.4
pads on no net: Designator6.Mire Designator7.Mire P1.4 P1.6 P4.6 P4.A1 P4.A2 P4.A3 P4.A4 P4.A5 P4.A6 P4.A7 P6.6 U4.2 V2.1
copper on no net: | length 4
  Component Side w0.254: 82,48.6 81,48.6 81,50.6 82,50.6

## Polygon pours and split planes (outlines as drawn)
NetD1_1 on Bottom Layer "Cablage Top-No Net" (solid, remove dead copper, pour order 11): 26.67,65.532 24.13,65.532 21.717,65.532 18.415,62.23 15.24,62.23 15.24,59.69 17.78,59.69 18.415,59.055 19.939,59.055 25.273,59.055 26.67,60.452
NetP1_5 on Bottom Layer "Cablage Top-No Net" (solid, remove dead copper, pour order 9): 26.67,66.04 21.59,66.04 17.78,69.306 16.51,69.306 15.24,70.394 15.24,71.483 16.646,72.889 25.028,72.889 26.67,71.247 26.67,72.009
GND on Bottom Layer "Mid-Layer 1-No Net" (solid, remove dead copper, pour order 7): 81.697,98.533 81.473,98.308 48.042,98.308 47.04,98.308 47.04,85.833 47.04,79.826 44.856,77.642 40.595,77.642 33.437,70.485 33.437,64.878 33.437,47.641 40.211,40.867 43.196,40.867 45.383,40.867 48.149,40.867 48.042,38.208 48.149,38.102 48.149,33.268 48.149,32.332 47.04,31.223 40.846,31.223 40.211,30.588 40.211,17.603 41.196,16.618 44.867,16.618 48.042,13.443 48.042,10.268 48.042,10.027 45.108,7.093 41.164,7.093 40.846,7.093 40.211,6.458 40.211,0.108 81.697,0.108
NetP1_5 on Component Side "Cablage Top-No Net" (solid, remove dead copper, pour order 10): 26.67,66.04 21.59,66.04 17.78,69.306 16.51,69.306 15.24,70.394 15.24,71.483 16.646,72.889 25.028,72.889 26.67,71.247 26.67,72.009
NetD1_1 on Component Side "Cablage Top-No Net" (solid, remove dead copper, pour order 12): 26.67,65.532 24.13,65.532 21.717,65.532 18.415,62.23 15.24,62.23 15.24,59.69 17.78,59.69 18.415,59.055 19.939,59.055 25.273,59.055 26.67,60.452
GND on Component Side "Mid-Layer 1-No Net" (solid, remove dead copper, pour order 8): 81.697,98.533 81.473,98.308 48.042,98.308 47.04,98.308 47.04,85.833 47.04,79.826 44.856,77.642 40.595,77.642 33.437,70.485 33.437,64.878 33.437,47.641 40.211,40.867 43.196,40.867 45.383,40.867 48.149,40.867 48.042,38.208 48.149,38.102 48.149,33.268 48.149,32.332 47.04,31.223 40.846,31.223 40.211,30.588 40.211,17.603 41.196,16.618 44.867,16.618 48.042,13.443 48.042,10.268 48.042,10.027 45.108,7.093 41.164,7.093 40.846,7.093 40.211,6.458 40.211,0.108 81.697,0.108

## Keep-outs
Keep-Out Layer:
  the board outline again, w0.254

## Other copper
Component Side:
  rectangle net +5: 58.166,14.732 63.754,20.843
  rectangle net NetP1_5: 16.51,68.961 23.622,72.898
  rectangle net NetP1_5: 24.384,68.707 26.67,70.993
  rectangle net NetD1_1: 24.384,60.579 26.67,62.992
  text "CUIVRE TOP" at 178.989,-131.114 h4
Bottom Layer:
  rectangle net NetD1_1: 24.511,60.579 26.67,62.738
  rectangle net NetP1_5: 24.206,68.834 26.67,70.968
  text "CUIVRE BOTTOM" at -52.532,-131.749 h4

## Silkscreen, mask and mechanical layers (free items; w line width, h text height)
Top Overlay:
  lines w0.199: 1.945,85.94 1.945,86.337 ; 2.54,85.344 2.54,86.932 ; 3.135,84.748 3.135,87.528 ; 3.731,84.153 3.731,88.124
  lines w0.2: 3.731,86.106 5.461,86.106
  lines w0.254: 3.81,70.739 5.588,70.739 ; 3.81,81.026 5.588,81.026 ; 3.81,91.199 5.588,91.199 ; 3.937,60.746 5.715,60.746 ; 4.466,10.677 6.244,10.677 ; 4.593,5.615 6.371,5.615 ; 4.593,15.757 6.371,15.757 ; 4.593,20.855 6.371,20.855 ; 4.699,85.712 5.461,86.106 ; 4.699,86.614 5.461,86.119 ; 4.826,70.345 5.588,70.739 ; 4.826,71.234 5.588,70.739 ; 4.826,80.632 5.588,81.026 ; 4.826,81.521 5.588,81.026 ; 4.826,90.805 5.588,91.199 ; 4.826,91.694 5.588,91.199 ; 4.953,60.352 5.715,60.746 ; 4.953,61.241 5.715,60.746 ; 5.482,10.283 6.244,10.677 ; 5.482,11.172 6.244,10.677 ; 5.609,5.221 6.371,5.615 ; 5.609,6.11 6.371,5.615 ; 5.609,15.363 6.371,15.757 ; 5.609,16.252 6.371,15.757 ; 5.609,20.461 6.371,20.855 ; 5.609,21.35 6.371,20.855
  text "220V" at 1.27,93.726 h2.6 r270
  text "220V" at 1.27,83.185 h2.6 r270
  text "CONSUMPTION" at 1.27,73.025 h2.6 r270
  text "BUS 485" at 68.58,72.39 h4
  text "MDI" at 14.732,50.292 h6
  text "220V" at 59.793,49.911 h3
  text "Systemes" at 16.383,48.26 h3
  text "Busy" at 59.9,47.13 h3
  text "No" at 4.572,42.672 h3 r270
  text "Off Machine" at 1.778,42.545 h3 r270
  text "C" at 4.572,36.703 h3 r270
  text "Nc" at 4.699,32.258 h3 r270
  text "Off" at 48.786,30.607 h3
  text "+" at 75.239,27.362 h6 r90
  text "Empty" at 2.032,21.336 h3 r270
  text "Start" at 48.112,17.412 h3
  text "12V Ext." at 80.137,16.383 h3 r90
  text "Start machine" at 1.651,13.335 h2.6 r270
  text "-" at 75.67,11.873 h8 r90
  text "Power" at 57.912,4.699 h3
  text "I/O BOARD V5" at 51.541,1.283 h4
  text "PLAN D'EQUIPEMENT TOP" at 179.116,-131.114 h4
Bottom Overlay:
  text "PLAN D'EQUIPEMENT BOTTOM" at -35.514,-131.749 h4
  text ".Layer_Name" at 1.189,-140.639 h2
Top Paste:
  lines w0.3: -58.441,-94.379 -58.441,184.621 -58.386,185.666 -58.223,186.7 -57.952,187.711 -57.577,188.688 -57.101,189.621 -56.531,190.499 -55.872,191.312 -55.132,192.052 -54.319,192.711 -53.441,193.281 -52.508,193.756 -51.531,194.132 -50.52,194.402 -49.486,194.566 -48.441,194.621 130.559,194.621 131.604,194.566 132.638,194.402 133.649,194.132 134.626,193.756 135.559,193.281 136.437,192.711 137.25,192.052 137.99,191.312 138.649,190.499 139.219,189.621 139.694,188.688 140.07,187.711 140.34,186.7 140.504,185.666 140.559,184.621 140.559,-94.379 140.504,-95.424 140.34,-96.458 140.07,-97.469 139.694,-98.446 139.219,-99.379 138.649,-100.257 137.99,-101.07 137.25,-101.81 136.437,-102.469 135.559,-103.039 134.626,-103.514 133.649,-103.89 132.638,-104.16 131.604,-104.324 130.559,-104.379 -48.441,-104.379 -49.486,-104.324 -50.52,-104.16 -51.531,-103.89 -52.508,-103.514 -53.441,-103.039 -54.319,-102.469 -55.132,-101.81 -55.872,-101.07 -56.531,-100.257 -57.101,-99.379 -57.577,-98.446 -57.952,-97.469 -58.223,-96.458 -58.386,-95.424 -58.441,-94.379
  text "PATE A BRASER TOP" at 179.37,-131.368 h4
Bottom Paste:
  text "PATE A BRASER BOTTOM" at -35.768,-131.749 h4
Top Solder:
  text "VERNIS EPARGNE TOP" at 179.116,-131.368 h4
Solder Side:
  text "VERNIS EPARGNE BOTTOM" at -39.705,-132.003 h4
Fond de plan Bottom:
  circle w0.127: c36.442,-106.349 r2
  circle w0.127: c36.442,-106.349 r3
  lines w0.127: -128.351,-79.425 -123.271,-79.425 ; -128.351,-8.94 -123.271,-8.94 ; -128.351,61.545 -123.271,61.545 ; -106.304,-144.995 -106.304,-134.989 ; -79.075,-149.91 -79.075,-144.83 ; -79.075,126.95 -79.075,132.03 ; -29.799,-149.91 -29.799,-144.83 ; -29.799,126.95 -29.799,132.03 ; -9.306,-134.989 -9.306,-119.995 ; 19.35,-149.91 19.35,-144.83 ; 19.35,126.95 19.35,132.03 ; 21.702,-139.732 65.863,-139.732 ; 21.702,-134.975 65.863,-134.975 ; 21.702,-130.229 65.863,-130.229 ; 21.702,-125.485 65.863,-125.485 ; 21.702,-121.146 65.832,-121.147 ; 32.685,-106.349 42.291,-106.349 ; 36.442,-110.017 36.442,-102.669 ; 36.698,-144.995 36.698,-121.147 ; 43.353,-106.349 45.766,-106.349 ; 46.782,-106.349 59.055,-106.349 ; 51.693,-144.995 51.693,-121.147 ; 68.499,-149.91 68.499,-144.83 ; 68.499,126.95 68.499,132.03 ; 117.775,-149.91 117.775,-144.83 ; 117.775,126.95 117.775,132.03 ; 166.924,-149.91 166.924,-144.83 ; 166.924,126.95 166.924,132.03 ; 216.073,-149.91 216.073,-144.83 ; 216.073,126.95 216.073,132.03 ; 260.269,-79.425 265.349,-79.425 ; 260.269,-8.94 265.349,-8.94 ; 260.269,61.545 265.349,61.545 ; -128.351,-149.91 -128.351,132.03 265.349,132.03 265.349,-149.91 -128.351,-149.91 ; -123.271,-144.83 -123.271,126.95 260.269,126.95 260.269,-144.83 -123.271,-144.83 ; 49.055,-109.349 56.055,-108.349 56.055,-104.349 49.055,-103.349 49.055,-109.349
  lines w0.5: -123.297,-134.989 21.702,-134.989 ; -123.297,-119.995 21.702,-119.995 ; -123.297,-111.252 21.702,-111.252 65.862,-111.252 ; -37.906,-144.995 -37.906,-134.989 ; -23.296,-134.989 -23.296,-119.995 ; -23.296,-124.997 21.702,-124.997 ; -23.198,-130 4.696,-130 21.702,-130 ; 4.696,-134.989 4.696,-119.995 ; 21.702,-144.995 21.702,-90.979 ; 21.702,-121.146 65.578,-121.146 ; 21.702,-116.416 65.578,-116.416 ; 21.702,-101.446 65.862,-101.446 ; 36.698,-121.147 36.698,-116.466 ; 51.693,-121.147 51.693,-116.457 ; -123.297,-144.995 65.863,-144.98 65.862,-90.964 -123.297,-90.979 -123.297,-144.995
  text "8" at -103.129,128.601 h1.78
  text "7" at -54.107,128.601 h1.78
  text "6" at -4.577,128.601 h1.78
  text "5" at 44.445,128.601 h1.78
  text "4" at 93.721,128.601 h1.78
  text "3" at 143.013,128.601 h1.78
  text "2" at 192.273,128.601 h1.78
  text "1" at 241.312,128.601 h1.78
  text "A" at -125.176,94.615 h1.78
  text "A" at 263.444,94.615 h1.78
  text "B" at -125.176,24.003 h1.78
  text "B" at 263.444,24.003 h1.78
  text "C" at -125.176,-46.609 h1.78
  text "C" at 263.444,-46.609 h1.78
  text "ECHELLE : 1" at 63.546,-96.951 h3
  text "MDI" at -47.355,-100.507 h8
  text "Systems" at -48.879,-104.571 h4
  text "MODIFICATIONS" at 51.862,-114.731 h3
  text "Ce document est la propriété de MDI System" at -30.307,-114.858 h3
  text "D" at -125.176,-116.713 h1.78
  text "D" at 263.444,-116.713 h1.78
  text "Il ne peut être reproduit ou communiqué sans son autorisation" at -16.718,-118.414 h3
  text "Visa" at 31.923,-119.557 h3
  text "Date" at 46.782,-119.557 h3
  text "Indice" at 61.895,-119.557 h3
  text "NOM" at 0.681,-123.494 h3
  text "DATE" at -12.282,-123.621 h3
  text "SB" at 31.161,-124.129 h3
  text "09/07/14" at 48.62,-124.32 h3
  text "2" at 59.542,-124.32 h3
  text "DESIGNATION : I/O BOARD" at -25.363,-124.764 h4
  text "Etablie" at 16.937,-128.32 h3
  text "13/09/13" at -12.028,-128.574 h2.5
  text "SB" at 31.034,-128.574 h3
  text "19/12/14" at 48.493,-128.765 h3
  text "3" at 59.415,-128.765 h3
  text "SB" at -0.471,-128.955 h3
  text "Vérifiée" at 17.445,-133.4 h3
  text "SB" at 30.907,-133.4 h3
  text "10/04/15" at 48.366,-133.591 h3
  text "4" at 59.436,-133.604 h3
  text "MATIERE :" at 18.325,-137.972 h3
  text "SB" at 30.78,-137.972 h3
  text "31/01/17" at 48.239,-138.163 h3
  text "5" at 59.309,-138.176 h3
  text "FEUILLE" at -110.825,-138.353 h3
  text "N°" at -39.197,-141.655 h6
  text "1/1" at -113.492,-142.798 h1.3
  text "8" at -103.129,-148.259 h1.78
  text "7" at -54.107,-148.259 h1.78
  text "6" at -4.577,-148.259 h1.78
  text "5" at 44.445,-148.259 h1.78
  text "4" at 93.721,-148.259 h1.78
  text "3" at 143.013,-148.259 h1.78
  text "2" at 192.273,-148.259 h1.78
  text "1" at 241.312,-148.259 h1.78
Fond de plan:
  circle w0.127: c100.555,-106.349 r2
  circle w0.127: c100.555,-106.349 r3
  lines w0.127: -128.351,-79.425 -123.271,-79.425 ; -128.351,-8.94 -123.271,-8.94 ; -128.351,61.545 -123.271,61.545 ; -79.075,-149.91 -79.075,-144.83 ; -79.075,126.95 -79.075,132.03 ; -29.926,-149.91 -29.926,-144.83 ; -29.926,126.95 -29.926,132.03 ; 19.223,-149.91 19.223,-144.83 ; 19.223,126.95 19.223,132.03 ; 68.499,-149.91 68.499,-144.83 ; 68.499,126.95 68.499,132.03 ; 71.135,-139.732 115.295,-139.732 ; 71.135,-134.975 115.295,-134.975 ; 71.135,-130.229 115.295,-130.229 ; 71.135,-125.485 115.295,-125.485 ; 71.166,-121.147 115.295,-121.146 ; 77.942,-106.349 90.216,-106.349 ; 85.304,-144.995 85.304,-121.147 ; 91.232,-106.349 93.645,-106.349 ; 94.706,-106.349 104.313,-106.349 ; 100.299,-144.995 100.299,-121.147 ; 100.555,-110.017 100.555,-102.669 ; 117.648,-149.91 117.648,-144.83 ; 117.648,126.95 117.648,132.03 ; 146.303,-134.989 146.303,-119.995 ; 166.797,-149.91 166.797,-144.83 ; 166.797,126.95 166.797,132.03 ; 216.073,-149.91 216.073,-144.83 ; 216.073,126.95 216.073,132.03 ; 243.301,-144.995 243.301,-134.989 ; 260.269,-79.425 265.349,-79.425 ; 260.269,-8.94 265.349,-8.94 ; 260.269,61.545 265.349,61.545 ; -128.351,-149.91 265.349,-149.91 265.349,132.03 -128.351,132.03 -128.351,-149.91 ; -123.271,-144.83 260.269,-144.83 260.269,126.95 -123.271,126.95 -123.271,-144.83 ; 80.942,-108.349 80.942,-104.349 87.942,-103.349 87.942,-109.349 80.942,-108.349
  lines w0.5: 71.136,-111.252 115.295,-111.252 260.294,-111.252 ; 71.136,-101.446 115.295,-101.446 ; 71.419,-121.146 115.295,-121.146 ; 71.419,-116.416 115.295,-116.416 ; 85.304,-121.147 85.304,-116.457 ; 100.299,-121.147 100.299,-116.466 ; 115.295,-144.995 115.295,-90.979 ; 115.295,-134.989 260.294,-134.989 ; 115.295,-130 132.301,-130 160.195,-130 ; 115.295,-124.997 160.294,-124.997 ; 115.295,-119.995 260.294,-119.995 ; 132.301,-134.989 132.301,-119.995 ; 160.294,-134.989 160.294,-119.995 ; 179.094,-144.995 179.094,-134.989 ; 71.135,-144.98 71.135,-90.964 260.294,-90.979 260.294,-144.995 71.135,-144.98
  text "1" at -104.314,128.601 h1.78
  text "2" at -55.276,128.601 h1.78
  text "3" at -6.016,128.601 h1.78
  text "4" at 43.276,128.601 h1.78
  text "5" at 92.552,128.601 h1.78
  text "6" at 141.574,128.601 h1.78
  text "7" at 191.104,128.601 h1.78
  text "8" at 240.126,128.601 h1.78
  text "A" at -126.446,94.615 h1.78
  text "A" at 262.174,94.615 h1.78
  text "B" at -126.446,24.003 h1.78
  text "B" at 262.174,24.003 h1.78
  text "C" at -126.446,-46.609 h1.78
  text "C" at 262.174,-46.609 h1.78
  text "ECHELLE : 1" at 73.325,-97.078 h3
  text "MDI" at 174.895,-99.745 h8
  text "Systems" at 176.673,-104.063 h4
  text "MODIFICATIONS" at 85.009,-114.858 h3
  text "Ce document est la propriété de MDI System" at 167.305,-114.858 h3
  text "D" at -126.446,-116.713 h1.78
  text "D" at 262.174,-116.713 h1.78
  text "Il ne peut être reproduit ou communiqué sans son autorisation" at 153.716,-118.414 h3
  text "Indice" at 75.103,-119.557 h3
  text "Date" at 90.216,-119.557 h3
  text "Visa" at 105.075,-119.557 h3
  text "NOM" at 136.317,-123.494 h3
  text "DATE" at 149.28,-123.621 h3
  text "2" at 76.962,-124.079 h3
  text "09/07/14" at 88.244,-124.066 h3
  text "SB" at 106.024,-124.32 h3
  text "DESIGNATION : I/O BOARD" at 162.361,-124.764 h4
  text "Etablie" at 120.061,-128.32 h3
  text "13/09/13" at 149.026,-128.574 h2.5
  text "3" at 76.835,-128.651 h3
  text "19/12/14" at 88.117,-128.638 h3
  text "SB" at 105.897,-128.892 h3
  text "SB" at 137.469,-128.955 h3
  text "Vérifiée" at 119.553,-133.4 h3
  text "4" at 76.835,-133.477 h3
  text "10/04/15" at 88.117,-133.464 h3
  text "SB" at 105.897,-133.718 h3
  text "MATIERE :" at 118.673,-137.972 h3
  text "5" at 77.089,-138.303 h3
  text "31/01/17" at 88.371,-138.29 h3
  text "FEUILLE" at 247.823,-138.353 h3
  text "SB" at 106.151,-138.544 h3
  text "N°" at 182.037,-141.401 h6
  text "1/1" at 250.49,-142.798 h1.3
  text "1" at -104.314,-148.259 h1.78
  text "2" at -55.276,-148.259 h1.78
  text "3" at -6.016,-148.259 h1.78
  text "4" at 43.276,-148.259 h1.78
  text "5" at 92.552,-148.259 h1.78
  text "6" at 141.574,-148.259 h1.78
  text "7" at 191.104,-148.259 h1.78
  text "8" at 240.126,-148.259 h1.78
Drill Drawing:
  lines w0.15: 179.598,77.178 179.598,80.678 182.718,80.678 182.718,77.178 179.598,77.178 ; 186.098,66.678 186.098,70.178 189.218,70.178 189.218,66.678 186.098,66.678 ; 186.598,77.178 189.718,77.178 189.718,80.678 186.598,80.678 186.598,77.178 ; 193.478,96.178 196.598,96.178 196.598,99.678 193.478,99.678 193.478,96.178 ; 193.978,86.678 197.098,86.678 197.098,90.178 193.978,90.178 193.978,86.678 ; 195.478,77.178 195.478,80.678 198.598,80.678 198.598,77.178 195.478,77.178 ; 199.098,66.678 202.218,66.678 202.218,70.178 199.098,70.178 199.098,66.678 ; 202.978,96.178 206.098,96.178 206.098,99.678 202.978,99.678 202.978,96.178 ; 204.478,106.178 204.478,109.678 207.598,109.678 207.598,106.178 204.478,106.178 ; 204.598,77.178 204.598,80.678 207.718,80.678 207.718,77.178 204.598,77.178 ; 206.978,86.678 206.978,90.178 210.098,90.178 210.098,86.678 206.978,86.678 ; 208.478,106.178 211.598,106.178 211.598,109.678 208.478,109.678 208.478,106.178 ; 212.478,106.178 215.598,106.178 215.598,109.678 212.478,109.678 212.478,106.178 ; 212.978,96.178 216.098,96.178 216.098,99.678 212.978,99.678 212.978,96.178 ; 213.098,77.178 213.098,80.678 216.218,80.678 216.218,77.178 213.098,77.178 ; 216.478,106.178 219.598,106.178 219.598,109.678 216.478,109.678 216.478,106.178 ; 220.478,106.178 223.598,106.178 223.598,109.678 220.478,109.678 220.478,106.178 ; 221.098,77.178 221.098,80.678 224.218,80.678 224.218,77.178 221.098,77.178 ; 222.978,96.178 222.978,99.678 226.098,99.678 226.098,96.178 222.978,96.178 ; 226.598,66.678 229.718,66.678 229.718,70.178 226.598,70.178 226.598,66.678 ; 233.598,66.678 233.598,70.178 236.718,70.178 236.718,66.678 233.598,66.678 ; 241.098,66.678 241.098,70.178 244.218,70.178 244.218,66.678 241.098,66.678 ; 248.098,78.678 251.218,78.678 251.218,82.178 248.098,82.178 248.098,78.678 ; 248.098,84.178 251.218,84.178 251.218,87.678 248.098,87.678 248.098,84.178 ; 248.098,89.678 251.218,89.678 251.218,93.178 248.098,93.178 248.098,89.678 ; 248.098,95.178 248.098,98.678 251.218,98.678 251.218,95.178 248.098,95.178
  lines w0.254: 0,0 0,48.6 1,48.6 1,50.6 0,50.6 0,99.2 35.5,99.2 35.5,98.2 46.5,98.2 46.5,99.2 82,99.2 82,50.6 81,50.6 81,48.6 81.996,48.603 81.996,0 46.5,0 46.5,1 35.5,1 35.5,0 0,0
  lines w0.381: -122.958,-135.091 -24.432,-135.091 ; -122.958,-96.991 -24.432,-96.991 ; -108.966,-138.901 -108.966,-93.181 ; -91.242,-138.901 -91.242,-93.181 ; -57.063,-138.901 -57.063,-93.181 ; -44.214,-138.901 -44.214,-93.181 ; -122.958,-138.901 -24.432,-138.901 -24.432,-93.181 -122.958,-93.181 -122.958,-138.901
  lines w0.5: 164.958,64.178 164.956,121.093 254.598,121.178 254.598,64.178 165.307,64.178 ; 165.307,74.678 254.598,74.678 ; 165.307,94.678 228.098,94.678 ; 165.307,104.293 254.598,104.293 ; 165.307,112.293 254.598,112.293 ; 187.598,94.678 187.598,104.178 ; 187.598,104.293 187.598,112.293 ; 228.307,74.678 228.307,104.293 228.307,112.293
  text "Spécification du circuit imprimé" at 184.098,116.678 h5
  text "Process de Fabrication : RoHS" at 195.098,113.678 h3
  text "Ep. CI.:" at 233.598,107.678 h3
  text "1,6mm" at 241.598,107.678 h3
  text "Nbre de couches :" at 166.098,107.178 h3
  text "2" at 184.598,107.178 h3
  text "2" at 205.348,106.928 h4
  text "4" at 213.298,106.878 h4
  text "5" at 217.498,106.878 h4
  text "6" at 221.398,106.878 h4
  text "3" at 209.498,106.778 h4
  text "CLASSE :" at 192.098,106.678 h4
  text "X" at 209.098,106.478 h3
  text "Epaiss. cuivre de base" at 195.098,101.178 h3
  text "FINITION :" at 237.098,100.678 h3
  text "MATIERE :" at 168.498,100.178 h3
  text "FR4" at 179.598,100.178 h3
  text "HTg : Tg  140° C" at 168.498,97.478 h3
  text "35µ" at 189.098,97.178 h3
  text "70µ" at 198.598,97.178 h3
  text "105µ" at 207.598,97.178 h3
  text "140µ" at 217.598,97.178 h3
  text "X" at 193.998,96.378 h3
  text "HAL" at 230.598,96.178 h3
  text "X" at 248.598,95.378 h3
  text "Vernis épargne :" at 166.598,91.678 h3
  text "Face Top" at 191.978,91.678 h3
  text "Face Bottom" at 202.978,91.678 h3
  text "NiAu" at 230.598,90.678 h3
  text "X" at 194.398,86.878 h3
  text "X" at 207.498,86.878 h3
  text "NiAu+ Contact" at 230.598,84.678 h3
  text "Couleur :" at 166.598,82.178 h3
  text "Vert" at 179.098,82.178 h3
  text "Noir" at 186.598,82.178 h3
  text "Noir Mat" at 193.098,82.178 h3
  text "Blanc" at 204.098,82.178 h3
  text "Rouge" at 211.598,82.178 h3
  text "Bleu" at 220.598,82.178 h3
  text "Argent" at 230.598,79.678 h3
  text "X" at 180.098,77.378 h3
  text "Sérigraphie :" at 166.598,71.678 h3
  text "Face Top" at 184.098,71.678 h3
  text "Face Bottom" at 195.098,71.678 h3
  text "Couleur :" at 214.598,71.678 h3
  text "Blanc" at 225.598,71.678 h3
  text "Noir" at 233.098,71.678 h3
  text "Jaune" at 240.098,71.678 h3
  text "X" at 186.598,66.878 h3
  text "X" at 227.098,66.878 h3
  text "Symbol" at -120.672,-95.848 h1.83
  text "Hit Count" at -107.823,-95.848 h1.83
  text "Finished Hole Size" at -90.099,-95.848 h1.83
  text "Plated" at -55.92,-95.848 h1.83
  text "Hole Type" at -43.071,-95.848 h1.83
  text "3" at -107.823,-99.658 h1.52
  text "1,000mm (39,37mil)" at -90.099,-99.658 h1.52
  text "NPTH" at -55.92,-99.658 h1.52
  text "Round" at -43.071,-99.658 h1.52
  text "G" at -121.411,-99.912 h1.69
  text "4" at -107.823,-103.468 h1.52
  text "1,300mm (51,18mil)" at -90.099,-103.468 h1.52
  text "PTH" at -55.92,-103.468 h1.52
  text "Round" at -43.071,-103.468 h1.52
  text "A" at -121.411,-103.722 h1.69
  text "4" at -107.823,-107.278 h1.52
  text "2,300mm (90,55mil)" at -90.099,-107.278 h1.52
  text "NPTH" at -55.92,-107.278 h1.52
  text "Round" at -43.071,-107.278 h1.52
  text "F" at -121.411,-107.532 h1.69
  text "4" at -107.823,-111.088 h1.52
  text "4,199mm (165,33mil)" at -90.099,-111.088 h1.52
  text "PTH" at -55.92,-111.088 h1.52
  text "Round" at -43.071,-111.088 h1.52
  text "H" at -121.411,-111.342 h1.69
  text "7" at -107.823,-114.898 h1.52
  text "1,000mm (39,37mil)" at -90.099,-114.898 h1.52
  text "NPTH" at -55.92,-114.898 h1.52
  text "Slot" at -43.071,-114.898 h1.52
  text "J" at -121.411,-115.152 h1.69
  text "8" at -107.823,-118.708 h1.52
  text "1,524mm (60,00mil)" at -90.099,-118.708 h1.52
  text "PTH" at -55.92,-118.708 h1.52
  text "Round" at -43.071,-118.708 h1.52
  text "B" at -121.411,-118.962 h1.69
  text "9" at -107.823,-122.518 h1.52
  text "1,400mm (55,12mil)" at -90.099,-122.518 h1.52
  text "PTH" at -55.92,-122.518 h1.52
  text "Round" at -43.071,-122.518 h1.52
  text "C" at -121.411,-122.772 h1.69
  text "10" at -107.823,-126.328 h1.52
  text "1,000mm (39,37mil)" at -90.099,-126.328 h1.52
  text "PTH" at -55.92,-126.328 h1.52
  text "Round" at -43.071,-126.328 h1.52
  text "E" at -121.411,-126.582 h1.69
  text "10" at -107.823,-130.138 h1.52
  text "1,295mm (51,00mil)" at -90.099,-130.138 h1.52
  text "PTH" at -55.92,-130.138 h1.52
  text "Round" at -43.071,-130.138 h1.52
  text "D" at -121.411,-130.392 h1.69
  text "PLAN DE DETOURAGE ET PERCAGE" at 162.606,-131.368 h4
  text "44" at -107.823,-133.948 h1.52
  text "0,600mm (23,62mil)" at -90.099,-133.948 h1.52
  text "PTH" at -55.92,-133.948 h1.52
  text "Round" at -43.071,-133.948 h1.52
  text "I" at -121.129,-134.202 h1.69
  text "103 Total" at -107.823,-137.758 h1.52
  text "Slot definitions :" at -120.672,-141.441 h1.52
  text "Routed Path Length" at -94.442,-141.441 h1.52
  text "= Calculated from tool start centre position to tool end centre position." at -66.434,-141.441 h1.52
  text "Hole Length" at -94.442,-143.98 h1.52
  text "= Routed Path Length + Tool Size = Slot length as defined in the PCB layout" at -76.845,-143.98 h1.52

## Dimensions
0,99.2 to 35.5,98.2 on Drill Drawing
0,99.2 to 35.5,99.2 on Drill Drawing
35.5,98.2 to 46.5,98.2 on Drill Drawing
0,99.2 to 82,99.2 on Drill Drawing
0,0 to 1,48.6 on Drill Drawing
1,48.6 to 0,50.6 on Drill Drawing
81.996,0 to 82,99.2 on Drill Drawing
0,50.6 to 1,48.6 on Drill Drawing

## Text inside footprints (layer, text, board x,y; h text height)
P1: Top Overlay "7" at 11.13,60.719 h2.5 r270; Top Overlay "1" at 11.155,91.326 h2.5 r270; Cablage Top "1" at 11.155,91.326 h2.5 r270; Cablage Top "7" at 11.13,60.719 h2.5 r270
P2: Top Overlay "8" at 19.521,6.078 h1.52 r270; Top Overlay "1" at 19.521,41.384 h1.52 r270
P5: Top Overlay "1" at 53.578,36.83 h1.3 r180; Cablage Top "1" at 53.578,36.83 h1.3 r180
P6: Top Overlay "1" at 71.696,33.366 h1.2 r180
P7: Top Overlay "2" at 77.343,22.733 h2.5 r90; Top Overlay "1" at 77.343,17.399 h2.5 r90; Cablage Top "1" at 77.343,17.399 h2.5 r90; Cablage Top "2" at 77.343,22.733 h2.5 r90
P8: Top Overlay "1" at 60.198,79.248 h1.3; Cablage Top "1" at 60.198,79.248 h1.3
P10: Top Overlay "8" at 66.929,77.724 h2.5; Top Overlay "1" at 67.31,90.551 h2.5; Cablage Top "8" at 66.929,77.724 h2.5; Cablage Top "1" at 67.31,90.551 h2.5
P11: Top Overlay "8" at 67.183,54.356 h2.5; Top Overlay "1" at 67.056,67.31 h2.5; Cablage Top "8" at 67.183,54.356 h2.5; Cablage Top "1" at 67.077,67.31 h2.5